# Allegro board GroundBounce.brd
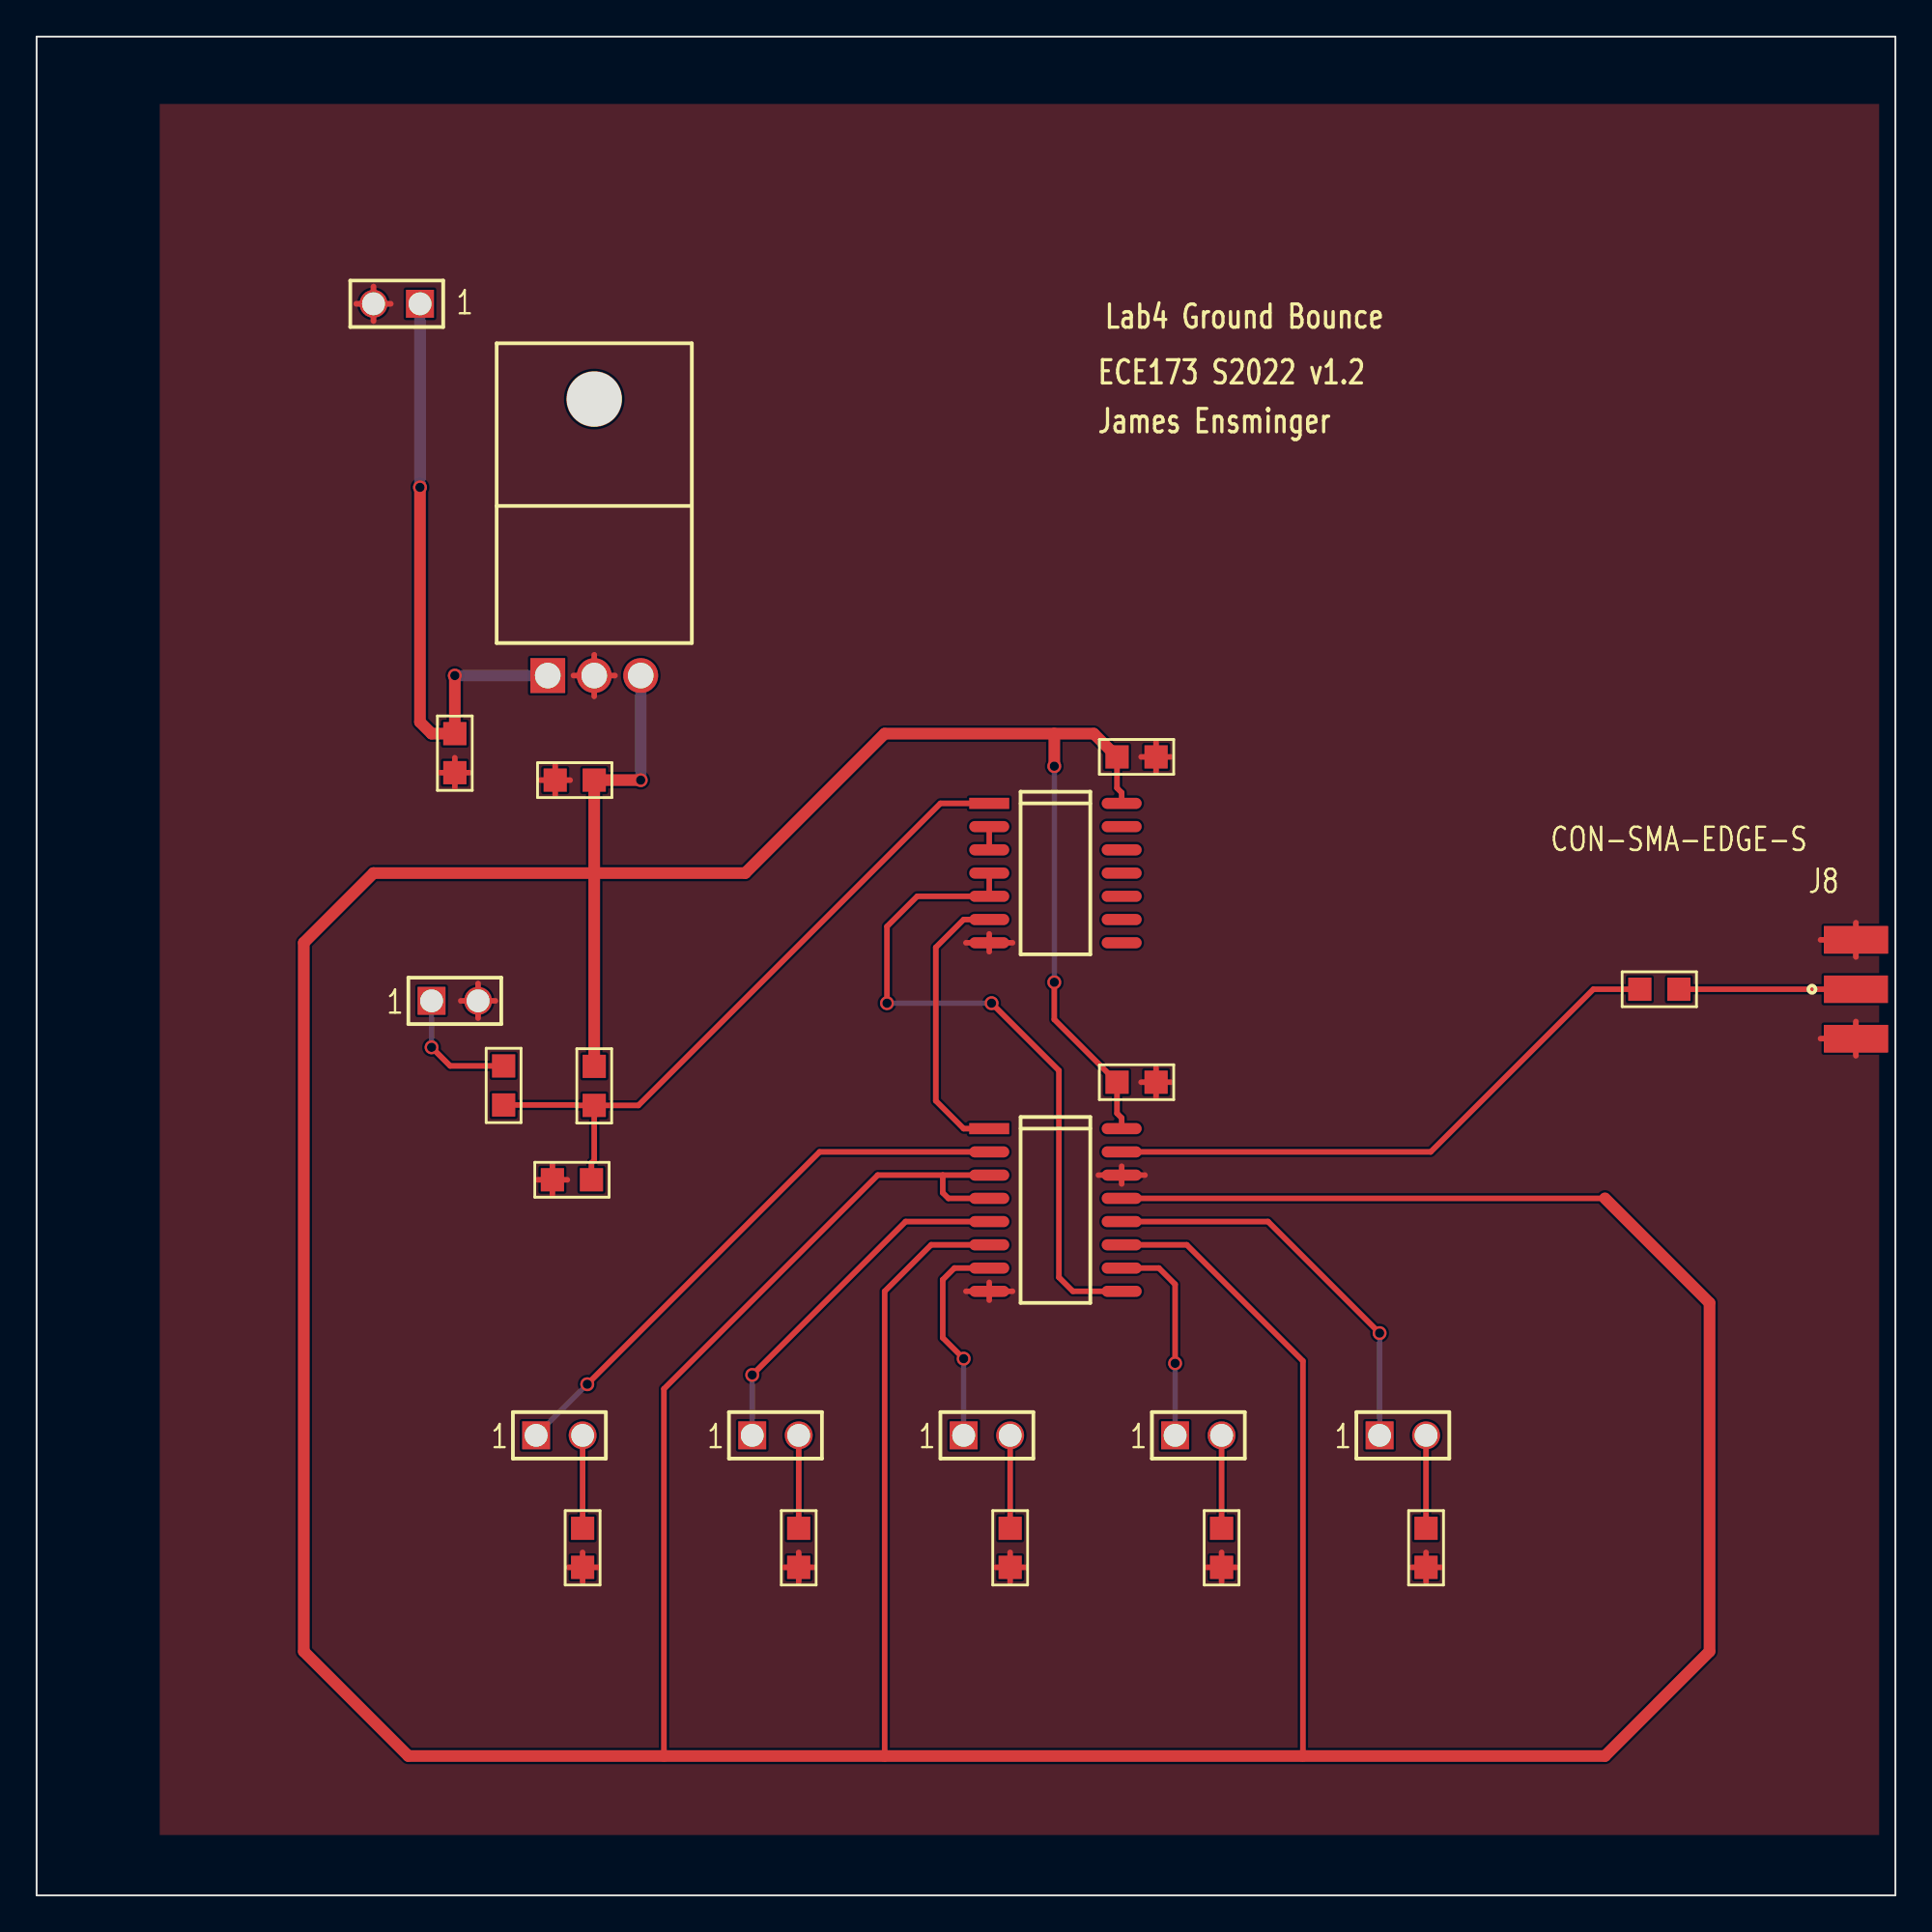
[diagram p0: board, top side]
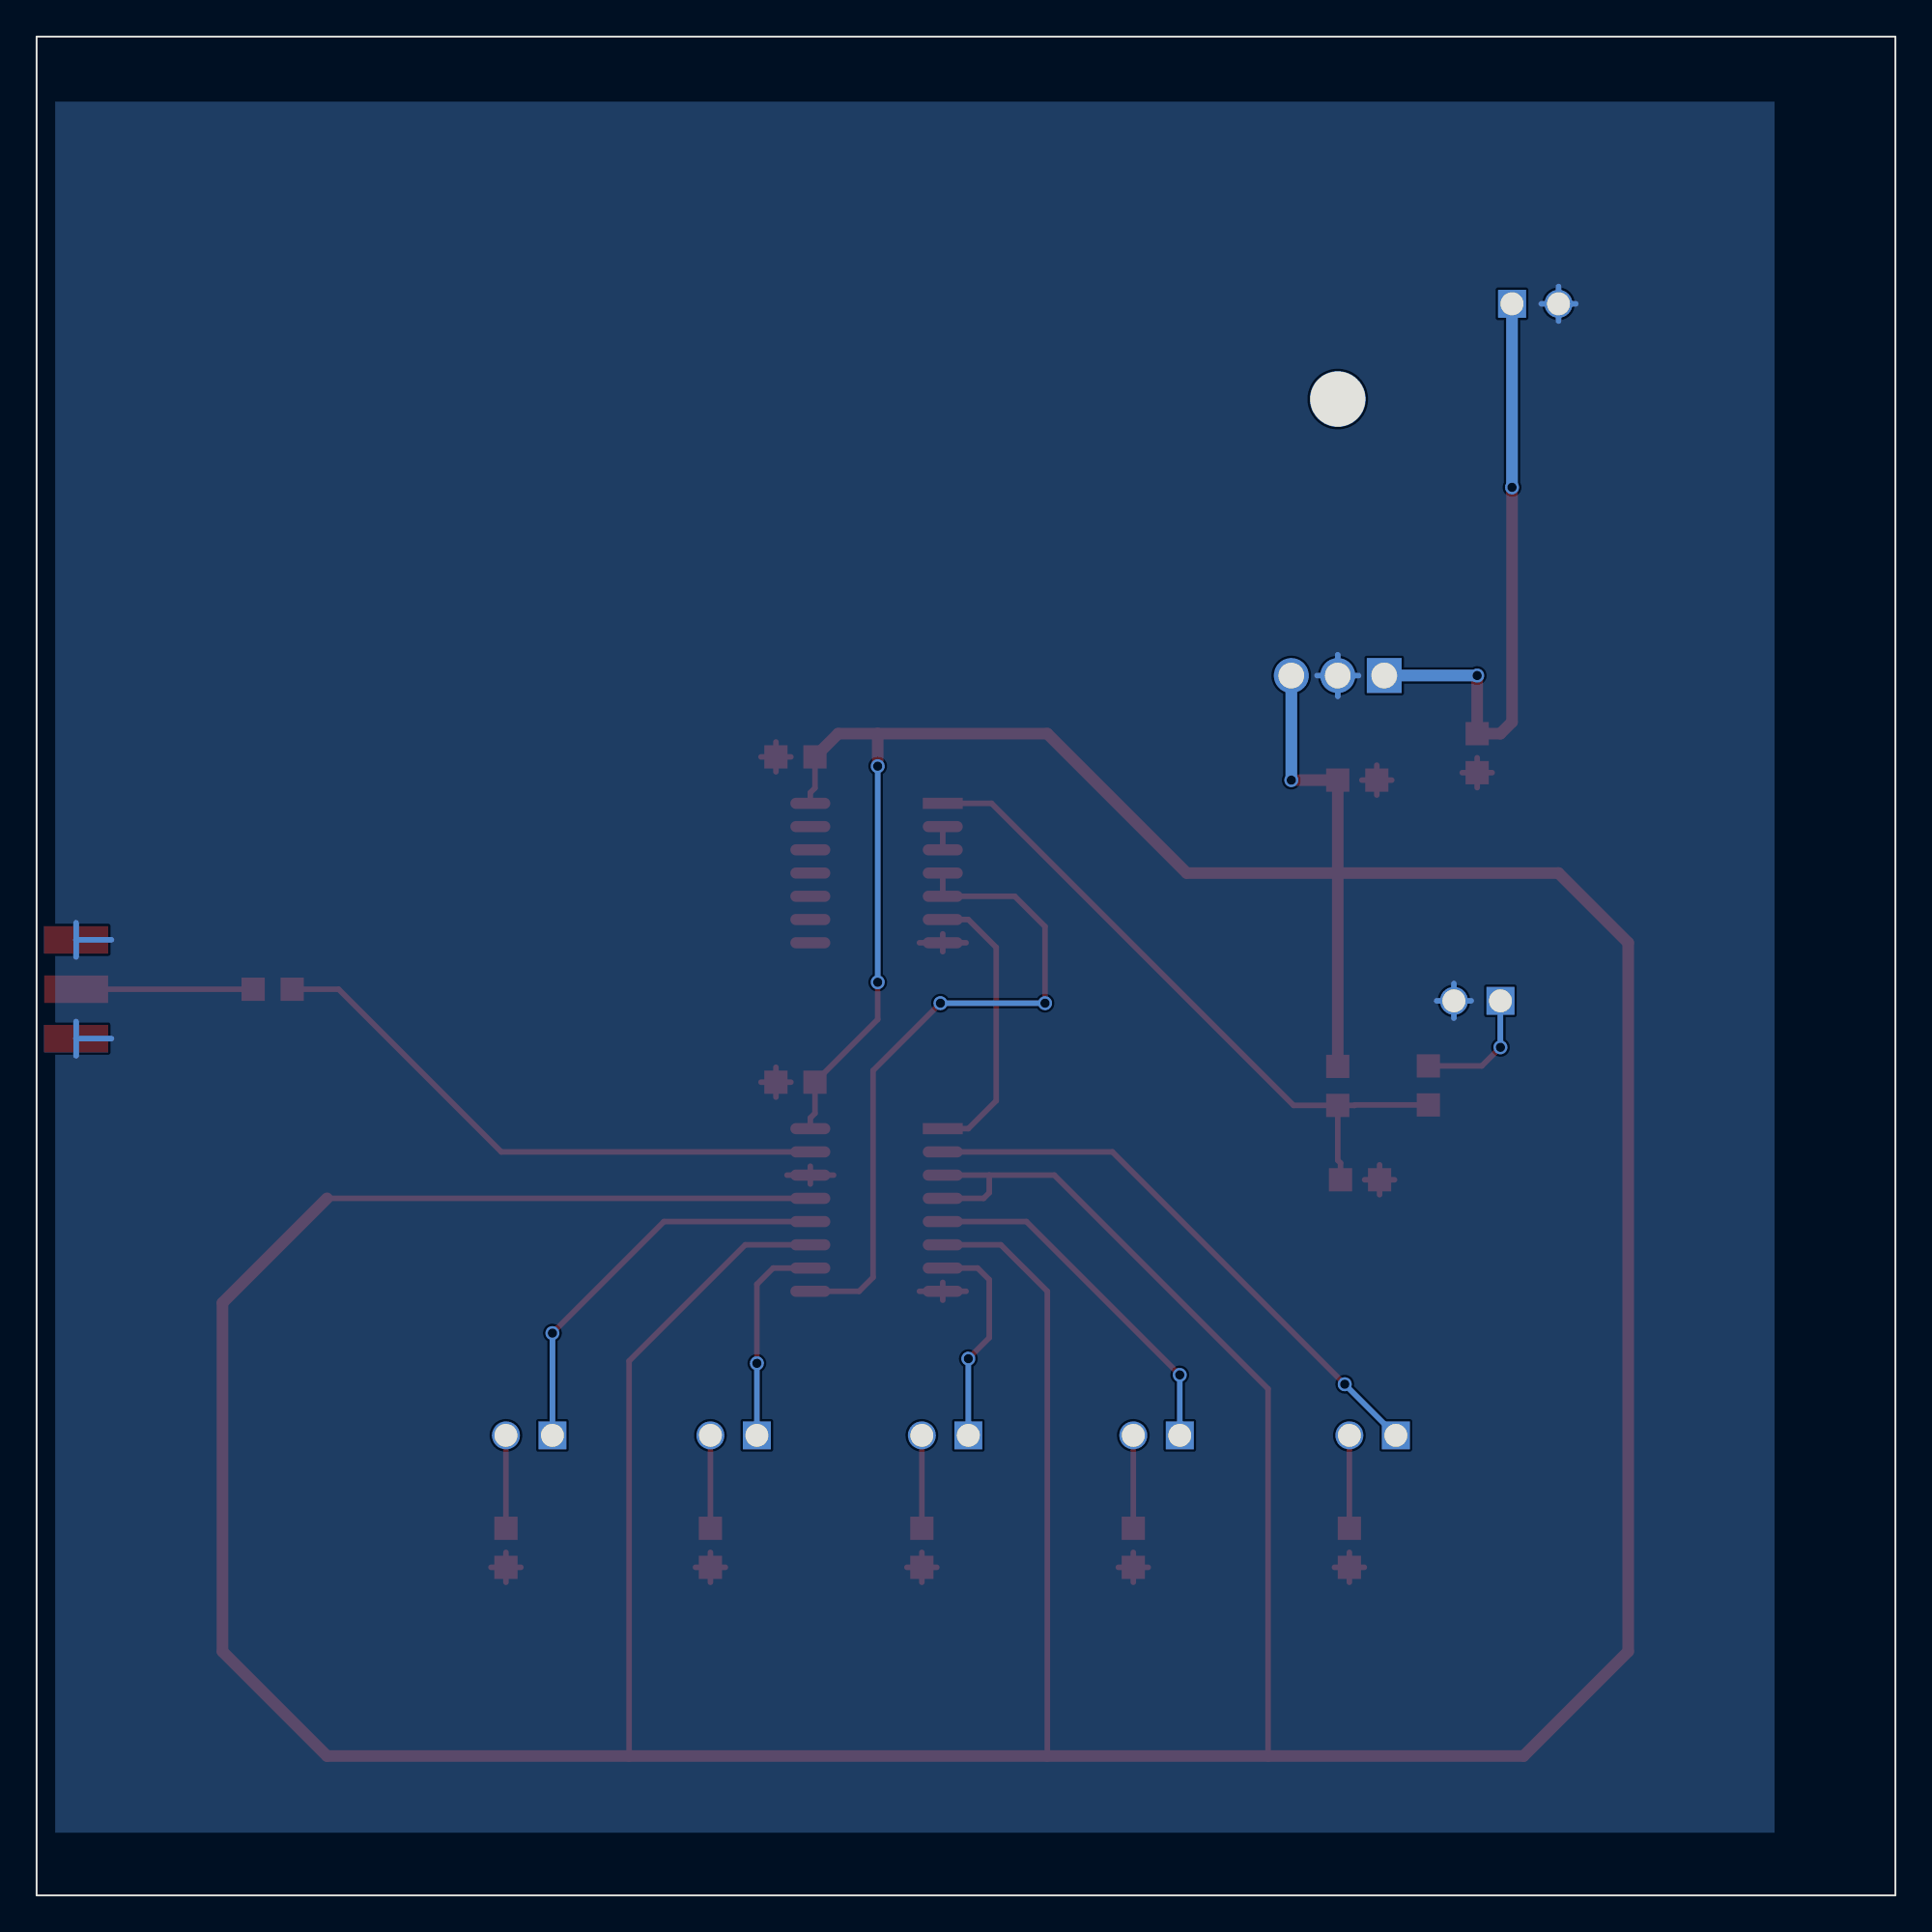
[diagram p1: board, bottom side, seen from below]

Outline 101.6 x 101.6 mm; copper layers: TOP, BOTTOM. Coordinates in mm from the lower left corner of the outline.
Outline path: rectangle 0,0 101.6,101.6 ; 0,101.6 0,0 101.6,0 101.6,101.6 0,101.6

## Design rules (mm)
constraint set DEFAULT: min track width 0.305

## Placement (name value [footprint] x y rotation side)
C1  15pF  [SMC0805]  29.84 20.07 270 top
C2  15pF  [SMC0805]  41.66 20.07 270 top
C3  15pF  [SMC0805]  53.21 20.07 270 top
C4  15pF  [SMC0805]  64.77 20.07 270 top
C5  15pF  [SMC0805]  75.95 20.07 270 top
C6  100n  [SMC0805]  25.53 45.34 270 top
C7  100n  [SMC0805]  22.86 63.5 270 top
C8  100n  [SMC0805]  30.48 60.96 180 top
C9  100n  [SMC0805]  59.05 62.23 0 top
C10  100n  [SMC0805]  59.05 44.45 0 top
J1  2Pin Header  [BCON_2X1V_100S_1SQ_42D]  27.3 25.15 0 top
J2  2Pin Header  [BCON_2X1V_100S_1SQ_42D]  39.12 25.15 0 top
J3  2Pin Header  [BCON_2X1V_100S_1SQ_42D]  50.67 25.15 0 top
J4  2Pin Header  [BCON_2X1V_100S_1SQ_42D]  62.23 25.15 0 top
J5  2Pin Header  [BCON_2X1V_100S_1SQ_42D]  73.41 25.15 0 top
J6  2Pin Header  [BCON_2X1V_100S_1SQ_42D]  21.59 48.9 0 top
J7  2Pin Header  [BCON_2X1V_100S_1SQ_42D]  20.95 87 180 top
J8  SMA/S  [RFSOLUTIONS_CON-SMA-EDGE-S]  99.44 49.53 180 top
R1  1k  [SMR0805]  87.63 49.53 0 top
R2  10k  [SMR0805]  30.48 43.18 90 top
R3  10k  [SMR0805]  28.19 39.12 0 top
U1  SN74AHC174  [SOJ05016WB300L400]  52.07 41.91 270 top
U2  74HC04  [SOJ05014WB300L350]  52.07 59.69 270 top
U3  LM7805/TO  [TO220AARF1]  27.94 66.67 270 top

## Library data of the parts
C1-C10 = C NP
J1-J7 = 2Pin Header
J8 = CON-SMA-EDGE-S
R1-R3 = R
U1 = SN74AHC174_2
U2 = 74HC04_17
U3 = LM7805/TO_10

## Footprints (pads in the part's own frame, mm; a bottom-side part is the same pattern mirrored in y, then rotated)
BCON_2X1V_100S_1SQ_42D
  rect 1.524x1.524 hole 1.25: 1(0,0)
  round 1.524 hole 1.25: 2(2.54,0)
RFSOLUTIONS_CON-SMA-EDGE-S
  rect 3.5x1.501 smd: 1(0,0) G1(0,2.7) G2(0,-2.7) G3(0,2.7) G4(0,-2.7)
SMC0805
  rect 1.27x1.27 smd: 1(0,0) 2(2.134,0)
SMR0805
  rect 1.27x1.27 smd: 1(0,0) 2(2.134,0)
SOJ05014WB300L350
  rect 0.61x2.184 smd: 1(0,0)
  oval 0.61x2.184 smd: 2(1.27,0) 3(2.54,0) 4(3.81,0) 5(5.08,0) 6(6.35,0) 7(7.62,0) 8(7.62,7.239) 9(6.35,7.239) 10(5.08,7.239) 11(3.81,7.239) 12(2.54,7.239) 13(1.27,7.239) 14(0,7.239)
SOJ05016WB300L400
  rect 0.61x2.184 smd: 1(0,0)
  oval 0.61x2.184 smd: 2(1.27,0) 3(2.54,0) 4(3.81,0) 5(5.08,0) 6(6.35,0) 7(7.62,0) 8(8.89,0) 9(8.89,7.239) 10(7.62,7.239) 11(6.35,7.239) 12(5.08,7.239) 13(3.81,7.239) 14(2.54,7.239) 15(1.27,7.239) 16(0,7.239)
TO220AARF1
  rect 1.905x1.905 hole 1.402: 1(0,0)
  round 1.905 hole 1.402: 2(0,2.54) 3(0,5.08)
  round 3.048 hole 3: HOLE22(-15.113,2.54)

## Nets
+5V: C8.1 C9.1 C10.1 R2.2(B) U1.3 U1.4 U1.6 U1.11 U1.13 U1.16 U2.14 U3.3
GND: C1.2(B) C2.2(B) C3.2(B) C4.2(B) C5.2(B) C7.2(B) C8.2(B) C9.2(B) C10.2(B) J6.2 J7.2 J8.G1 J8.G2 J8.G3 J8.G4(2__3) R3.1 U1.8 U1.14 U2.7 U3.2
N04842: J8.1 R1.2(B)
N05358: C6.1 J6.1
N05362: C6.2(B) R2.1 R3.2(B) U2.1
N05672: U2.2 U2.3
N08971: U1.1 U2.6
N09129: U1.9 U2.4 U2.5
N09636: R1.1 U1.15(Q6)
N09754: C5.1 J5.2
N09892: J5.1 U1.12
N10154: J4.1 U1.10
N10289: J3.1 U1.7
N10306: C4.1 J4.2
N10322: C3.1 J3.2
N10552: J2.1 U1.5
N10582: C2.1 J2.2
N10775: J1.1 U1.2
N10834: C1.1 J1.2
N14240: C7.1 J7.1 U3.1(VIN)

Pads without a net: U2 8 9 10 11 12 13; U3 HOLE22

## Via types
v1: diameter 0.762, hole 0.508, TOP to BOTTOM, 13 vias

## Routing (per net, layer and track width the routed paths; a pad name or vN(x,y) marks a point on that pad's centre or on a via; arc(x,y) is an arc through that point)
+5V: length 385.8
  TOP w0.305: 34.29,7.62 34.29,27.69 45.97,39.37 49.53,39.37 ; 49.53,39.37 U1.3 ; 49.53,39.37 49.53,38.4 49.83,38.1 U1.4 ; 69.22,7.62 69.22,29.21 62.87,35.56 U1.11 ; U2.14 59.31,60.27 59.05,60.53 C9.1 ; U1.6 48.9,35.56 46.35,33.02 46.35,7.62 ; U1.16 59.31,42.49 59.05,42.75 C10.1 55.63,47.88 v1(55.63,49.91) ; U1.13 85.72,38.1
  TOP w0.635: C9.1 57.78,63.5 55.63,63.5 ; 55.63,63.5 46.35,63.5 38.73,55.88 30.48,55.88 ; 55.63,63.5 v1(55.63,61.72) ; 30.48,55.88 R2.2 ; 30.48,55.88 18.41,55.88 14.61,52.07 14.61,13.34 20.32,7.62 85.72,7.62 91.44,13.34 91.44,32.38 85.72,38.1 ; 30.48,55.88 C8.1 v1(33.02,60.96)
  BOTTOM w0.305: v1(55.63,61.72) v1(55.63,49.91)
  BOTTOM w0.635: v1(33.02,60.96) U3.3
GND: length 82.5
  TOP w0.305: 18.41,86.05 J7.2 ; J7.2 18.41,87.94 ; J7.2 19.36,87 ; J7.2 17.47,87 ; C2.2 41.66,18.75 ; C2.2 42.47,17.93 ; C2.2 40.84,17.93 ; C2.2 41.66,17.12 ; C10.2 62,44.45 ; C10.2 60.37,44.45 ; C10.2 61.19,45.27 ; C10.2 61.19,43.63 ; C7.2 22.86,62.18 ; C7.2 22.86,60.55 ; C7.2 23.68,61.37 ; C7.2 22.04,61.37 ; C9.2 62,62.23 ; C9.2 61.19,61.41 ; C9.2 60.37,62.23 ; C9.2 61.19,63.05 ; 28.35,60.14 C8.2 ; C8.2 29.16,60.96 ; C8.2 27.53,60.96 ; C8.2 28.35,61.78 ; U3.2 30.48,67.81 ; U3.2 31.61,66.67 ; U3.2 29.35,66.67 ; U3.2 30.48,65.54 ; 75.95,17.12 C5.2 ; C5.2 75.95,18.75 ; C5.2 76.76,17.93 ; C5.2 75.13,17.93 ; 29.84,17.12 C1.2 ; C1.2 30.66,17.93 ; C1.2 29.03,17.93 ; C1.2 29.84,18.75 ; 52.4,17.93 C3.2 ; C3.2 53.21,17.12 ; C3.2 54.03,17.93 ; C3.2 53.21,18.75 ; 97.51,46.83 J8.G1 ; J8.G1 99.44,47.76 ; J8.G1 99.44,45.9 ; 27.38,39.12 R3.1 ; R3.1 29.01,39.12 ; R3.1 28.19,39.93 ; R3.1 28.19,38.3 ; 63.95,17.93 C4.2 ; C4.2 64.77,18.75 ; C4.2 64.77,17.12 ; C4.2 65.59,17.93 ; 97.51,52.23 J8.G2 ; J8.G2 99.44,53.16 ; J8.G2 99.44,51.3 ; 58.04,39.37 U1.14 ; U1.14 59.31,39.86 ; U1.14 60.58,39.37 ; U1.14 59.31,38.88 ; U1.8 52.07,33.51 ; U1.8 50.8,33.02 ; U1.8 52.07,32.53 ; U1.8 53.34,33.02 ; 50.8,52.07 U2.7 ; U2.7 52.07,51.58 ; U2.7 52.07,52.56 ; U2.7 53.34,52.07 ; 23.19,48.9 J6.2 ; J6.2 25.07,48.9 ; J6.2 24.13,47.95 ; J6.2 24.13,49.84
  BOTTOM w0.305: J6.2 24.13,49.84 ; J6.2 25.07,48.9 ; J6.2 24.13,47.95 ; J6.2 23.19,48.9 ; 99.44,51.3 J8.G2 ; J8.G2 99.44,53.16 ; J8.G2 97.51,52.23 ; U3.2 30.48,67.81 ; U3.2 30.48,65.54 ; U3.2 31.61,66.67 ; U3.2 29.35,66.67 ; 17.47,87 J7.2 ; J7.2 18.41,86.05 ; J7.2 18.41,87.94 ; J7.2 19.36,87 ; 97.51,46.83 J8.G1 ; J8.G1 99.44,47.76 ; J8.G1 99.44,45.9
N04842: length 9.7
  TOP w0.305: R1.2 J8.1
N05358: length 6.9
  TOP w0.305: v1(21.59,46.35) 22.61,45.34 C6.1
  BOTTOM w0.305: v1(21.59,46.35) J6.1
N05362: length 37.5
  TOP w0.305: R2.1 29.57,43.18 29.54,43.21 C6.2 ; R2.1 32.89,43.18 49.4,59.69 U2.1 ; R2.1 30.48,40.18 30.33,40.03 R3.2
N05672: length 1.3
  TOP w0.305: U2.2 U2.3
N08971: length 15.5
  TOP w0.305: U2.6 50.67,53.34 49.15,51.82 49.15,43.43 50.67,41.91 U1.1
N09129: length 37.7
  TOP w0.305: v1(46.48,48.77) 46.48,52.96 48.13,54.61 U2.5 U2.4 ; v1(52.2,48.77) 55.88,45.09 55.88,33.78 56.64,33.02 U1.9
  BOTTOM w0.305: v1(52.2,48.77) v1(46.48,48.77)
N09636: length 32
  TOP w0.305: R1.1 85.09,49.53 76.2,40.64 U1.15
N09754: length 5.1
  TOP w0.305: J5.2 C5.1
N09892: length 22.2
  TOP w0.305: v1(73.41,30.73) 67.31,36.83 U1.12
  BOTTOM w0.305: v1(73.41,30.73) J5.1
N10154: length 11.5
  TOP w0.305: U1.10 61.34,34.29 62.23,33.4 v1(62.23,29.08)
  BOTTOM w0.305: v1(62.23,29.08) J4.1
N10289: length 11.8
  TOP w0.305: v1(50.67,29.34) 49.53,30.48 49.53,33.66 50.16,34.29 U1.7
  BOTTOM w0.305: v1(50.67,29.34) J3.1
N10306: length 5.1
  TOP w0.305: J4.2 C4.1
N10322: length 5.1
  TOP w0.305: J3.2 C3.1
N10552: length 19.7
  TOP w0.305: v1(39.12,28.45) 47.5,36.83 U1.5
  BOTTOM w0.305: v1(39.12,28.45) J2.1
N10582: length 5.1
  TOP w0.305: J2.2 C2.1
N10775: length 31.2
  TOP w0.305: v1(30.1,27.94) 42.8,40.64 U1.2
  BOTTOM w0.305: v1(30.1,27.94) J1.1
N10834: length 5.1
  TOP w0.305: J1.2 C1.1
N14240: length 33.3
  TOP w0.635: v1(22.86,66.67) C7.1 21.59,63.5 20.95,64.14 v1(20.95,76.96)
  BOTTOM w0.635: v1(20.95,76.96) J7.1 ; v1(22.86,66.67) U3.1

## Copper pours and planes (outline as drawn; the poured copper is in the pictures)
GND on TOP: 6.73,97.92 6.73,3.3 100.71,3.3 100.71,97.92
GND on BOTTOM: 6.6,98.04 6.6,3.43 100.58,3.43 100.58,98.04

## Text on the board
Ref Des/Silkscreen Top: ECE173 S2022 v1.2 | James Ensminger | Lab4 Ground Bounce
NCLEGEND-1-2: FIGURE | FINISHED_SIZE | 118.1 | 55.2 | 49.2 | 20.0 | DRILL CHART: TOP to BOTTOM | ALL UNITS ARE IN MILS | PLATED | QTY | 1 | 3 | 14 | 13
